# Altium PCB shoot3.PcbDoc
Units mm, origin at the board's own origin, x right, y up, seen from the top; angles counter-clockwise.
Board outline 46.23 x 43.18 mm, 2 copper layers (Top Layer, Bottom Layer); 21 components, 48 nets, 73 pads, 0 vias.
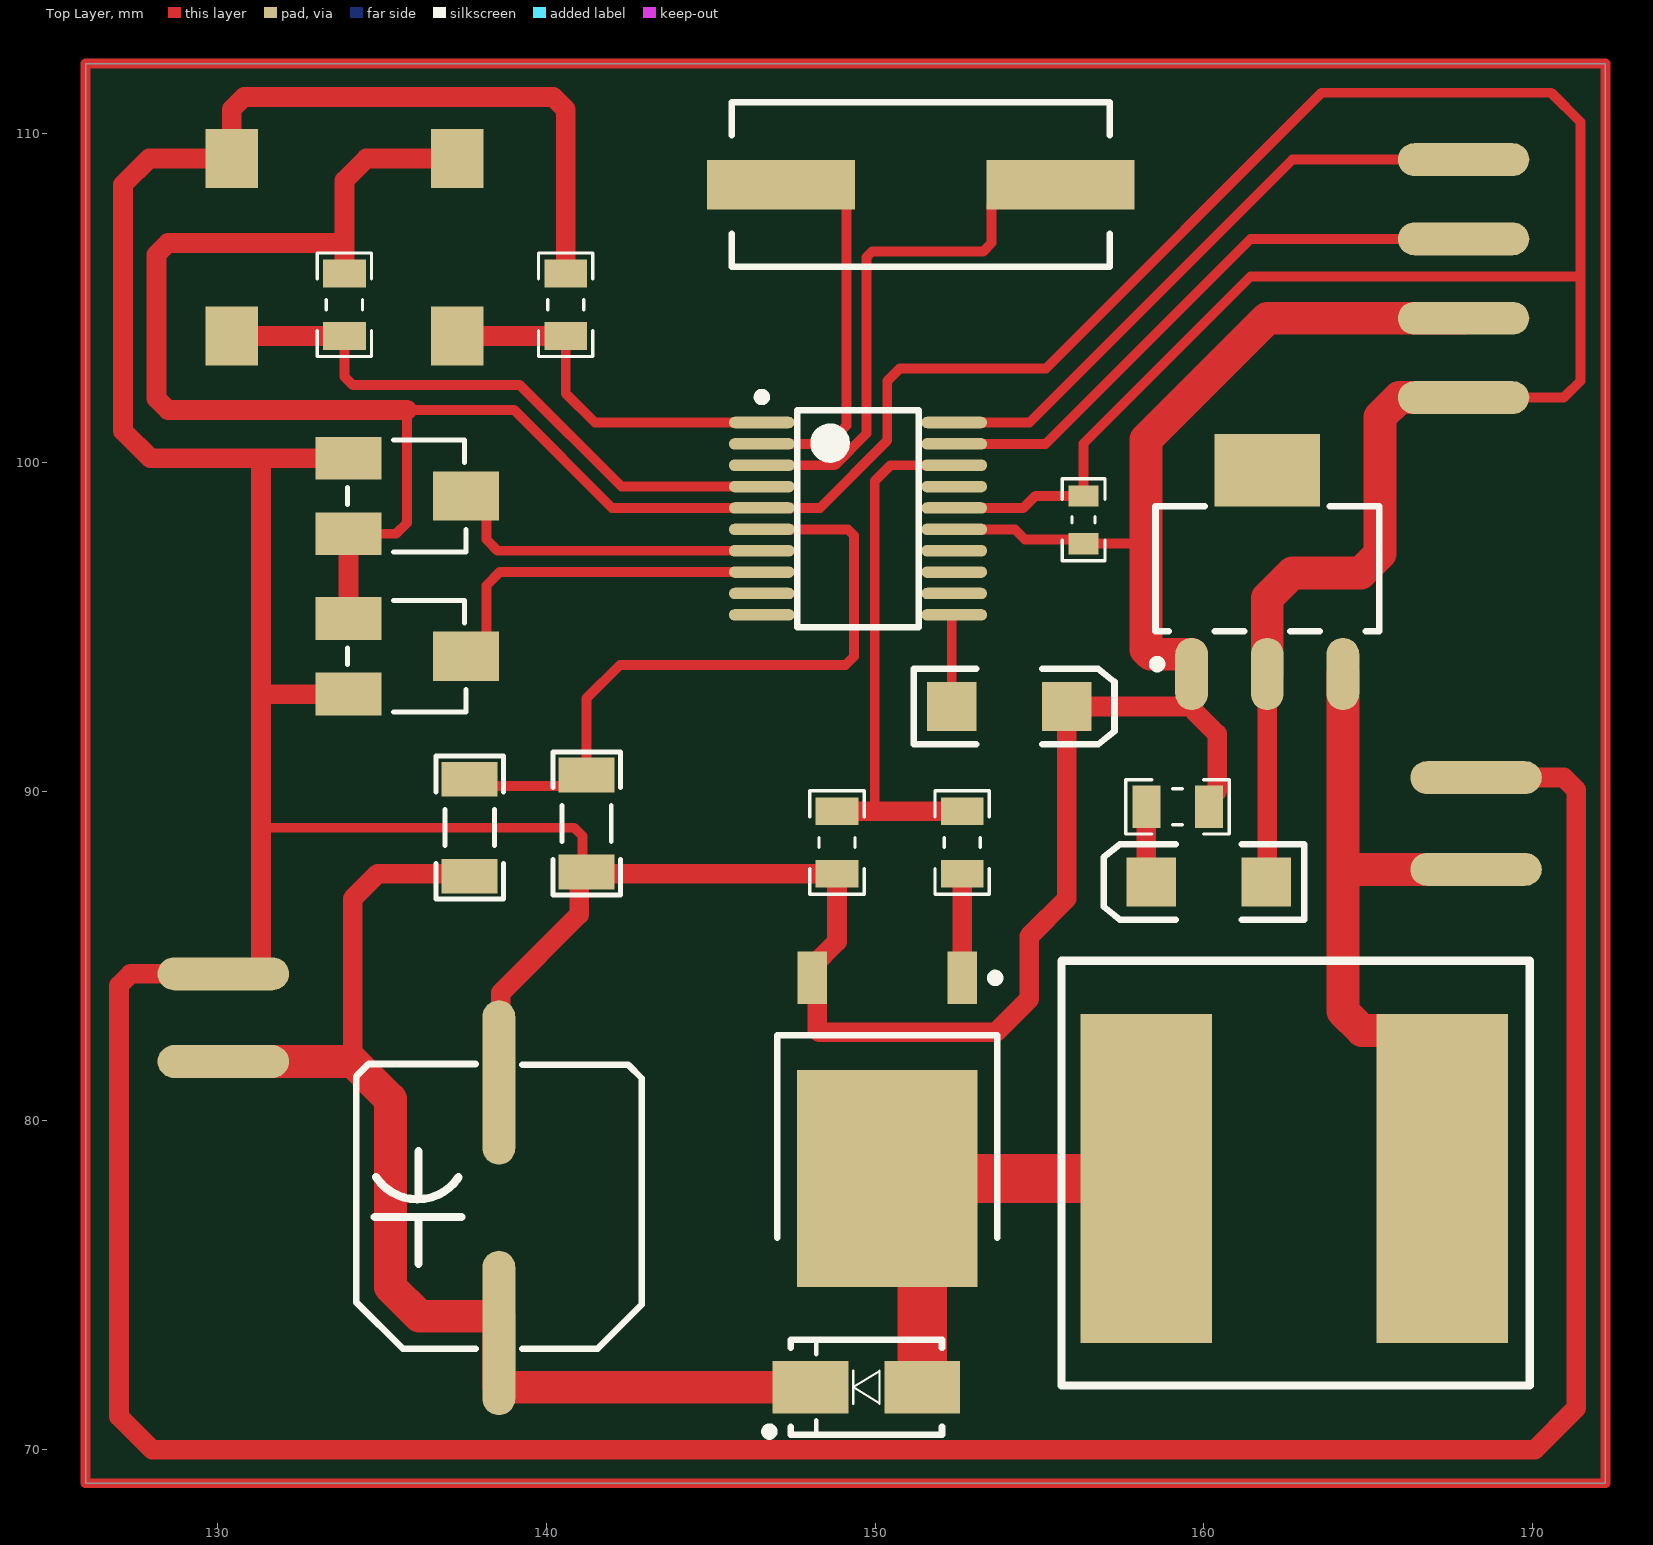
[diagram p0: Top Layer view]
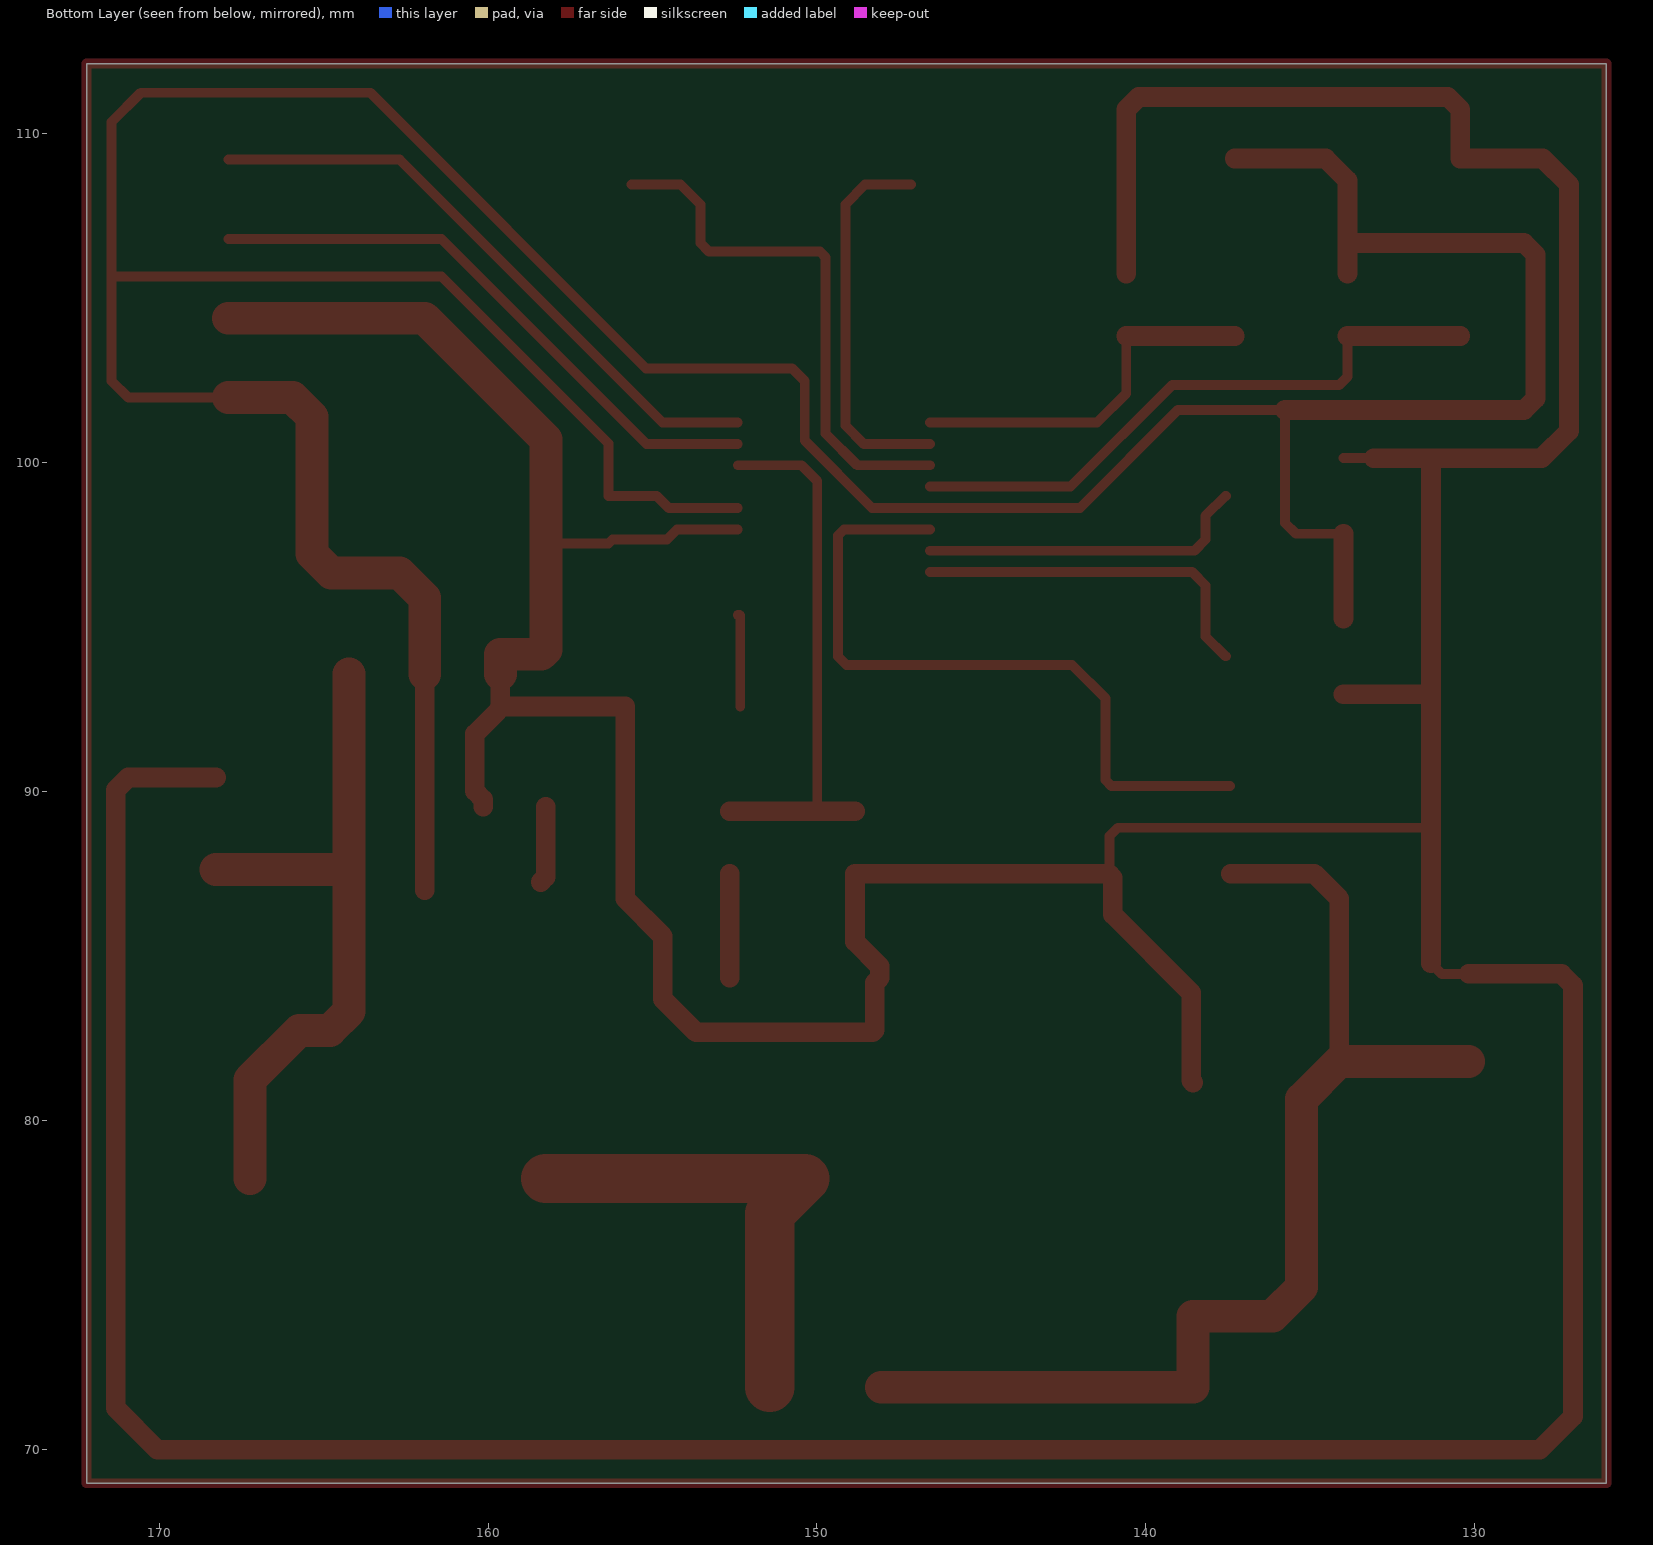
[diagram p1: Bottom Layer view, seen from below]
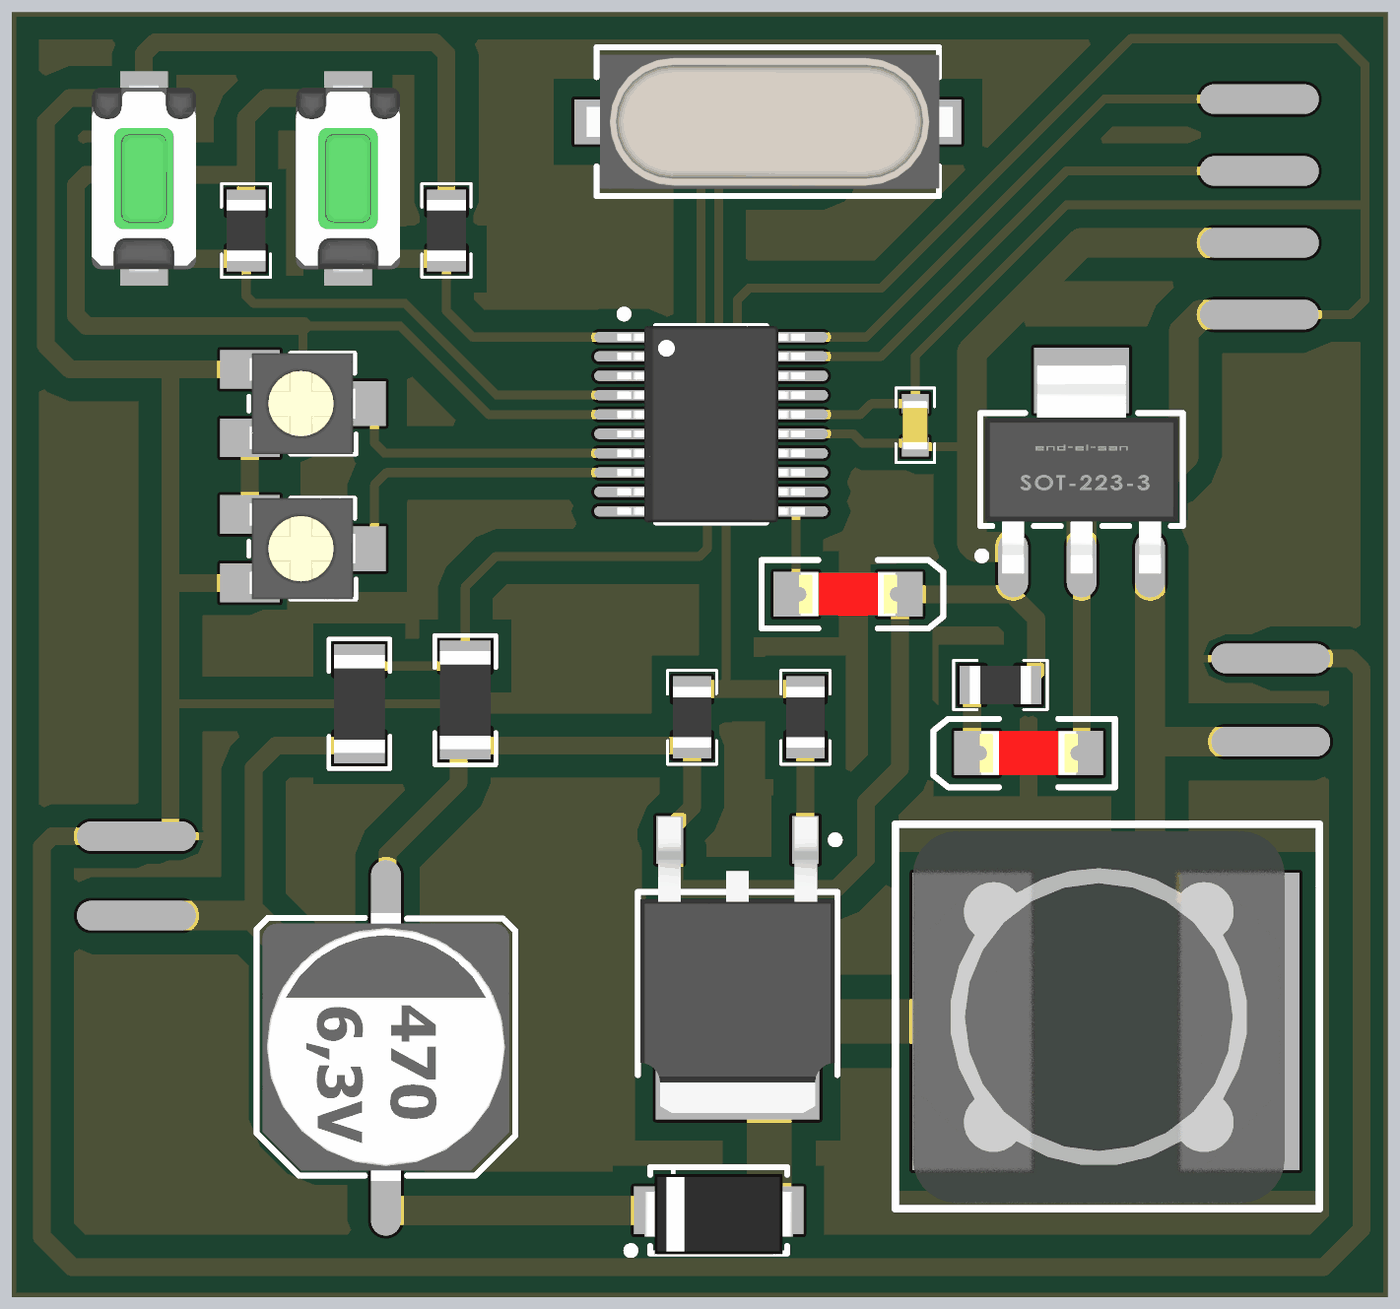
[diagram p2: 3D render of the assembled board from above, using the file's embedded part models]

## Layer stack, top to bottom
Top Solder: solder mask 0.0102, Solder Resist, Dk 3.5
Top Layer: signal copper 0.0356
Dielectric 1: dielectric 0.32, FR-4, Dk 4.8
Bottom Layer: signal copper 0.0356
Bottom Solder: solder mask 0.0102, Solder Resist, Dk 3.5

## Board outline
125.984,68.961 125.984,112.141 172.212,112.141 172.212,68.961

## Design rules (kind name [scope] priority, off if disabled: settings)
Clearance [All] p1: gap=0.2 ignorepadtopadclearanceinfootprint=FALSE except(0.3: Arc-Arc Arc-Track Track-Track; 0.7: Arc-Fill Arc-Poly Arc-Region Track-Fill Track-Poly Track-Region SMDPad-Fill SMDPad-Poly SMDPad-Region THPad-Fill THPad-Poly THPad-Region Via-Fill Via-Poly Via-Region Fill-Fill Fill-Poly Fill-Region Poly-Poly Poly-Region Region-Region)
ComponentClearance [All] p1 off: gap=0.254 collisioncheckmode=3 verticalgap=0.254 showdistances=FALSE
Height [All] p1: minheight=0 maxheight=1000 prefheight=12.7
PolygonConnect [All] p1: connectstyle=Relief reliefconductorwidth=0.254 reliefentries=4 polygonreliefangle="90 Angle" airgapwidth=0.254
RoutingVias [All] p1: holewidth=0.3 width=0.6 viastyle="Through Hole" minholewidth=0.1 minwidth=0.1 maxholewidth=10 maxwidth=10
SolderMaskExpansion [All] p1: expansion=0.102 istentingtop=FALSE
Width [All] p1: maxlimit=10 minlimit=0.1 preferedwidth=0.3
28 further rules are at their usual default settings.

## Components (designator, comment, footprint, x,y, rotation, side; value= is the part's Value field where it differs from the comment)
Y1 "" "Crystal SMD" 151.384,108.458 r180 top value="12 MHz"
? "Comment" RES1206 137.668,88.9 r90 top
? "Comment" RES1206 141.224,89.027 r90 top
? "" SOT223 161.925,96.774 r90 top
? "" INDUCTOR_SMD_3A 162.612,78.517 r0 top
? "" "LED 1206" 154.079,92.583 r0 top
? "" "CAP SMD 470uF" 138.557,77.343 r270 top
? "" RES0805 159.197,89.535 r0 top
? "" "LED 1206" 160.147,87.249 r180 top
? "" TSOP65P630X120-20N 149.479,98.298 r0 top
? "" RES0805 152.648,88.449 r90 top
? "" RES0805 148.84,88.449 r90 top
? "" "POT4MM-Small Pot" 135.985,98.989 r0 top
? "" "POT4MM-Small Pot" 135.985,94.114 r0 top
? "" RES0805 140.589,104.803 r270 top
? "" RES0805 133.858,104.803 r270 top
? "" TO252-3L 150.368,80.032 r270 top
? "" DIOM4629X24N 149.733,71.882 r180 top
? "" SMD_ALPS_SKQMBBE010 130.429,106.553 r270 top
? "" SMD_ALPS_SKQMBBE010 137.287,106.553 r270 top
? "" CAP0603 156.337,98.264 r90 top

## Footprints (in the part's own frame and the unit in brackets; to place one, negate y for a bottom-side part, rotate by r counter-clockwise, add the part's x,y. Pads: shape width x height; smd on the part's side, far side on the other; paste and mask are expansions set on the pad)
CAP0603 [mm] "Chip Capacitor, 2-Leads, Body 1/60x0/80mm, IPC Medium Density DESIGNER:ABBAS BASEREH"
  rect 0.65x0.9 smd: 1(-0.725,0) 2(0.725,0)
  silkscreen extent -1.25,-0.65 1.25,0.65, body extent -0.82,-0.43 0.82,0.43, height 0.4
"CAP SMD 470uF" [mm] "SMD CAP 470uF"
  oval 5x1 smd: 1(3.81,0) 2(-3.81,0)
  silkscreen extent -4.37,-4.34 4.29,4.34, body extent -4.53,-4.15 4.47,4.15, height 12
"Crystal SMD" [mm] "DESIGNER ABBAS BASEREH"
  rect 4.5x1.5 smd: 1(-4.25,0) 2(4.25,0)
  silkscreen extent -5.75,-2.5 5.75,2.5, body extent -6.21,-2.25 6.09,2.25, height 5.18
DIOM4629X24N [mm] "Molded Diode, 2-Leads, Body 4/60x2/90mm, IPC Medium Density-Design:Abbas Basereh"
  rect 2.3x1.6 smd: 1(-1.7,0) 2(1.7,0)
  silkscreen extent -2.3,-1.45 3.07,1.47, body extent -2.5,-1.22 2.5,1.48, height 2.2
INDUCTOR_SMD_3A [mm]
  rect 4x10 smd: 1(4.63,-0.285) 2(-4.37,-0.285)
  silkscreen extent -6.94,-6.58 7.3,6.34, body extent -6.36,-6.39 6.14,6.11, height 7.51
"LED 1206" [mm]
  rect 1.5x1.5 smd: 1(-1.75,0) 2(1.75,0)
  silkscreen extent -2.9,-1.15 3.2,1.15, body extent -1.65,-0.72 1.65,0.73, height 1.36
"POT4MM-Small Pot" [mm] "Square Trimming Potentiometer"
  rect 2x1.3 smd: CCW(-2,-1.15) CW(-2,1.15)
  rect 2x1.5 smd: W(1.568,0)
  silkscreen extent -2.03,-1.7 1.57,1.7, body extent -2.03,-1.7 1.57,1.7, height 2
RES0805 [mm] "Chip Resistor, 2-Leads, Body 2/00x1/25mm, IPC Medium Density DESIGNER:ABBAS BASEREH"
  rect 0.85x1.3 smd: 1(-0.95,0) 2(0.95,0)
  silkscreen extent -1.58,-0.82 1.58,0.82, body extent -1.02,-0.65 1.02,0.65, height 0.5
RES1206 [mm] "Chip Resistor, 2-Leads, Body 3/20x1/60mm, IPC Medium Density DESIGNER:ABBAS BASEREH"
  rect 1.05x1.7 smd: 1(-1.475,0) 2(1.475,0)
  silkscreen extent -2.17,-1.02 2.17,1.02, body extent -1.65,-0.85 1.65,0.85, height 0.94
SMD_ALPS_SKQMBBE010 [mm] "Vertical 6.0X3.5 mm Compact Type (SurfaceMount) SKQM Series ; Height 5.0 mm ; 50,000 Cycles ; 1.57N Force"
  rect 1.8x1.6 smd mask-1.27: 1(-2.7,0) 2(2.7,0)
  body extent -3.15,-1.75 3.15,1.75, height 5.03
SOT223 [mm] "SOT223, 4-Leads, Body 6.5x3.5mm, Pitch 2.30mm-Designer Abbas Basereh"
  oval 2.2x1 smd: 1(-3.2,2.3) 2(-3.2,0) 3(-3.2,-2.3)
  rect 2.2x3.2 smd: 4(3,0)
  Top Layer pour cut-out: -1.7,3.556 1.7,3.556 1.7,-3.556 -1.7,-3.556
  silkscreen extent -3.02,-3.4 1.9,3.47, body extent -3.5,-3.25 3.5,3.25, height 1.7
TO252-3L [mm] "D-PAK, 3-Pads, Body 6.2x6.7mm (max), IPC High Density"
  rect 1.6x0.9 smd: 1(-4.3,2.28) 3(-4.3,-2.28)
  rect 6.6x5.5 smd: 4(1.8,0)
  silkscreen extent -4.42,-3.35 3.6,3.41, body extent -5.06,-3.27 4.88,3.27, height 2.39
TSOP65P630X120-20N [mm] "TSOP, 20-Leads, Body 6.50x4.40mm, Pitch 0.65mm, IPC Medium Density"
  oval 2x0.35 smd: 1(-2.925,2.925) 2(-2.925,2.275) 3(-2.925,1.625) 4(-2.925,0.975) 5(-2.925,0.325) 6(-2.925,-0.325) 7(-2.925,-0.975) 8(-2.925,-1.625) 9(-2.925,-2.275) 10(-2.925,-2.925) 11(2.925,-2.925) 12(2.925,-2.275) 13(2.925,-1.625) 14(2.925,-0.975) 15(2.925,-0.325) 16(2.925,0.325) 17(2.925,0.975) 18(2.925,1.625) 19(2.925,2.275) 20(2.925,2.925)
  silkscreen extent -3.05,-3.3 1.85,3.82, body extent -3.15,-3.3 3.15,3.3, height 1.2

## Part data
Y1: library part XTAL, "XTAL Crystal", ComponentLink1Description=Datasheet, ComponentLink2Description=Reference, Design Date=2017-1-3, Designer="ABBAS BASEREH", Mounting Technology="Surface Mount\Through-Hole", Status=Unreleased
?: "FDD6690A"

## Free pads (board coordinates)
  oval 4x1 smd: 4(130.175,81.788) 4(130.175,84.455) 4(167.894,101.981) 4(167.894,104.394) 4(167.894,106.807) 4(167.894,109.22) 4(168.275,87.63) 4(168.275,90.424)

## Nets (pads, with @x,y where several pads share a name; then routed paths per layer and width w, separated by ;. In a path a pad name is that pad's centre, name@x,y a point inside that pad or via, vN(x,y) a via of type N, cw(c..) or ccw(c..) an arc to the next point about the centre after c; other vN are vias at no path point)
12v: ?.1@167.242,78.232 ?.3@164.225,93.574 pad.4@168.275,87.63 | length 21.2
  Top Layer w1: ?.3@164.225,93.574 164.225,87.63 ; ?.1@167.242,78.232 167.242,81.232 165.742,82.732 164.811,82.732 164.225,83.318 164.225,87.63 ; pad.4@168.275,87.63 164.225,87.63
50V: ?.1@137.668,87.425 ?.1@138.557,73.533 ?.2@148.033,71.882 pad.4@130.175,81.788 | length 35.1
  Top Layer w0.6: 134.112,81.788 134.112,86.741 134.87,87.499 ?.1@137.414,87.499
  Top Layer w1: pad.4@130.175,81.788 134.112,81.788 135.255,80.645 135.255,74.93 136.144,74.041 138.557,74.041 138.557,73.533 138.557,71.882 ?.2@148.033,71.882
A: 
ADC0: ?.2@137.668,90.375 ?.2@141.224,90.502 ?.6 | length 21.6
  Top Layer w0.3: ?.2@137.431,90.17 141.047,90.17 141.223,90.346 141.223,92.836 142.24,93.853 149.098,93.853 149.352,94.107 149.352,97.79 149.169,97.973 ?.6
ADC1: ?.7 ?.W@137.553,98.989 | length 10.1
  Top Layer w0.3: ?.W@137.553,98.989 137.576,98.989 138.176,98.389 138.176,97.663 138.516,97.323 ?.7
ADC2: ?.8 ?.W@137.553,94.114 | length 11
  Top Layer w0.3: ?.W@137.553,94.114 137.576,94.114 138.176,94.714 138.176,96.266 138.583,96.673 ?.8
ADC4: ?.10
ADC5: 
ADC6: ?.12
BAT+: 
BOOT0: ?.1@146.554,101.223 ?.2@137.287,103.853 ?.2@140.589,103.853 | length 11.4
  Top Layer w0.3: ?.2@140.589,103.853 140.589,102.108 141.474,101.223 ?.1@146.554,101.223
  Top Layer w0.6: ?.2@137.287,103.853 ?.2@140.589,103.853
C1: 
C2: 
E1: 
E2: 
E`: 
G1: 
G2: 
GATE2: ?.1@152.648,84.332 ?.1@152.648,87.499 | length 3.2
  Top Layer w0.6: ?.1@152.648,84.332 ?.1@152.648,87.499
GND: ?.1@130.429,109.253 ?.1@140.589,105.753 ?.1@141.224,87.552 ?.1@148.84,87.499 ?.1@156.337,97.539 ?.1@159.625,93.574 ?.2@138.557,81.153 ?.2@155.829,92.583 ?.2@160.147,89.535 ?.3@148.088,84.332 ?.15 ?.CCW@133.985,92.964 ?.CW@133.985,100.139 pad.4@130.175,84.455 pad.4@167.894,104.394 pad.4@168.275,90.424 | length 219.5
  Top Layer w0.3: pad.4@130.175,84.455 130.995,84.455 pad.4@131.318,84.778 ; 131.318,88.9 140.843,88.9 141.097,88.646 141.097,87.679 ?.1@141.224,87.552 ; ?.CW@133.064,100.139 ?.CW@133.985,100.139 ; ?.CCW@133.982,92.961 ?.CCW@133.985,92.964 ; ?.15 154.249,97.973 154.559,97.663 156.213,97.663 156.337,97.539 158.239,97.539 158.242,97.536
  Top Layer w0.6: pad.4@130.175,84.455 127.351,84.455 127,84.104 127,70.993 128.016,69.977 170.053,69.977 171.323,71.247 171.323,90.043 170.942,90.424 pad.4@168.275,90.424 ; pad.4@131.318,84.778 131.318,88.9 131.318,92.961 ; 131.318,100.076 131.318,92.961 ; ?.CW@133.064,100.139 131.318,100.139 127.953,100.139 127.127,100.965 127.127,108.458 127.922,109.253 130.429,109.253 130.429,110.744 130.81,111.125 140.208,111.125 140.589,110.744 ?.1@140.589,105.753 ; ?.CCW@133.982,92.961 131.318,92.961 ; ?.2@138.557,81.153 138.613,81.209 138.613,83.876 140.998,86.261 140.998,87.374 141.123,87.499 148.84,87.499 148.84,85.434 148.088,84.682 148.088,84.332 148.238,84.182 148.238,82.745 148.306,82.677 153.67,82.677 154.686,83.693 154.686,85.598 155.829,86.741 155.829,92.583 159.625,92.583 ?.1@159.625,93.574 ; 159.702,92.453 160.401,91.754 160.401,90.014 160.147,89.76 ?.2@160.147,89.535
  Top Layer w1: ?.1@159.625,93.574 159.625,94.174 158.38,94.174 158.242,94.312 158.242,97.536 158.242,100.711 161.925,104.394 pad.4@167.894,104.394
K: 
LED1: ?.13
LED2: ?.1@152.329,92.583 ?.11 | length 2.9
  Top Layer w0.3: ?.1@152.329,92.583 152.329,95.35 152.352,95.373 ?.11
LED3: ?.1@158.247,89.535 ?.2@158.397,87.249 | length 2.3
  Top Layer w0.6: ?.1@158.247,89.535 158.247,87.399 ?.2@158.397,87.249
LED4: ?.9
NET1: ?.1@151.433,71.882 ?.2@158.242,78.232 ?.4@150.368,78.232 | length 14.7
  Top Layer w1.5: ?.1@151.433,71.882 151.433,77.167 150.368,78.232 ?.2@158.242,78.232
NET2: 
NET3: 
NRST: ?.2@130.429,103.853 ?.2@133.858,103.853 ?.4@146.554,99.273 | length 18.7
  Top Layer w0.3: ?.2@133.858,103.853 133.858,102.616 134.112,102.362 139.192,102.362 142.281,99.273 ?.4@146.554,99.273
  Top Layer w0.6: ?.2@130.429,103.853 ?.2@133.858,103.853
OSC_IN: ?.2@146.554,100.573 Y1.2 | length 11.8
  Top Layer w0.3: ?.2@146.554,100.573 148.573,100.573 149.133,101.133 149.133,107.858 148.533,108.458 Y1.2
OSC_OUT: ?.3@146.554,99.923 Y1.1 | length 16.4
  Top Layer w0.3: ?.3@146.554,99.923 148.772,99.923 149.733,100.884 149.733,106.25 149.909,106.426 153.289,106.426 153.543,106.68 153.543,107.858 154.143,108.458 Y1.1
PWM: 
PWM2: 
PWM_B: 
PWM_G: ?.14
PWM_R: ?.17
SHOOT: 
SHOOTOUT: 
SPIN: 
SPINOUT: 
SWCLK: ?.20 pad.4@167.894,109.22 | length 18.8
  Top Layer w0.3: ?.20 154.69,101.223 162.687,109.22 pad.4@167.894,109.22
SWDIO: ?.19 pad.4@167.894,106.807 | length 18.1
  Top Layer w0.3: ?.19 155.183,100.573 161.417,106.807 pad.4@167.894,106.807
TIM1_CH3: ?.2@148.84,89.399 ?.2@152.648,89.399 ?.18 | length 16.5
  Top Layer w0.3: 149.987,89.399 149.987,99.441 150.469,99.923 ?.18
  Top Layer w0.6: ?.2@148.84,89.399 149.987,89.399 ?.2@152.648,89.399
VCC: ?.1@133.858,105.753 ?.1@137.287,109.253 ?.1@161.897,87.249 ?.2@156.337,98.989 ?.2@161.925,93.574 ?.5 ?.16 ?.CCW@133.985,97.839 ?.CW@133.985,95.264 pad.4@167.894,101.981 | length 130.4
  Top Layer w0.3: ?.CCW@133.985,97.839 135.431,97.839 135.763,98.171 135.763,101.6 139.025,101.6 142.002,98.623 ?.5 148.32,98.623 150.368,100.671 150.368,102.489 150.749,102.87 155.194,102.87 163.576,111.252 170.561,111.252 171.45,110.363 171.45,105.664 ; ?.16 154.503,98.623 154.869,98.989 156.337,98.989 156.337,100.584 161.417,105.664 171.45,105.664 ; pad.4@167.894,101.981 170.942,101.981 171.45,102.489 171.45,105.664
  Top Layer w0.6: ?.1@133.858,105.753 133.858,106.68 ; ?.CW@133.985,95.264 ?.CCW@133.985,97.839 ; 135.763,101.6 128.494,101.6 128.143,101.951 128.143,106.329 128.494,106.68 133.858,106.68 ; ?.1@137.287,109.253 134.526,109.253 133.858,108.585 133.858,106.68 ; ?.1@161.925,86.995 ?.2@161.925,93.574
  Top Layer w1: ?.2@161.925,93.574 161.925,95.885 162.687,96.647 164.768,96.647 165.354,97.233 165.354,101.395 165.94,101.981 pad.4@167.894,101.981
VIB2: 
Vin: 
VO: 
WD_2: 
pads on no net: ?.4@161.925,99.774
copper on no net: | length 178.8
  Top Layer w0.3: 125.984,68.961 125.984,112.141 172.212,112.141 172.212,68.961 125.984,68.961

## Polygon pours and split planes (outlines as drawn)
GND on Top Layer "NONET_L01_P000" (solid, shelved, pour order 0): 125.984,68.961 125.984,112.141 172.212,112.141 172.212,68.961